# Altium PCB PCB.PcbDoc
Units mil, origin at the board's own origin, x right, y up, seen from the top; angles counter-clockwise.
Board outline 3975 x 2500 mil, 2 copper layers (Top Layer, Bottom Layer); 62 components, 49 nets, 234 pads, 54 vias.
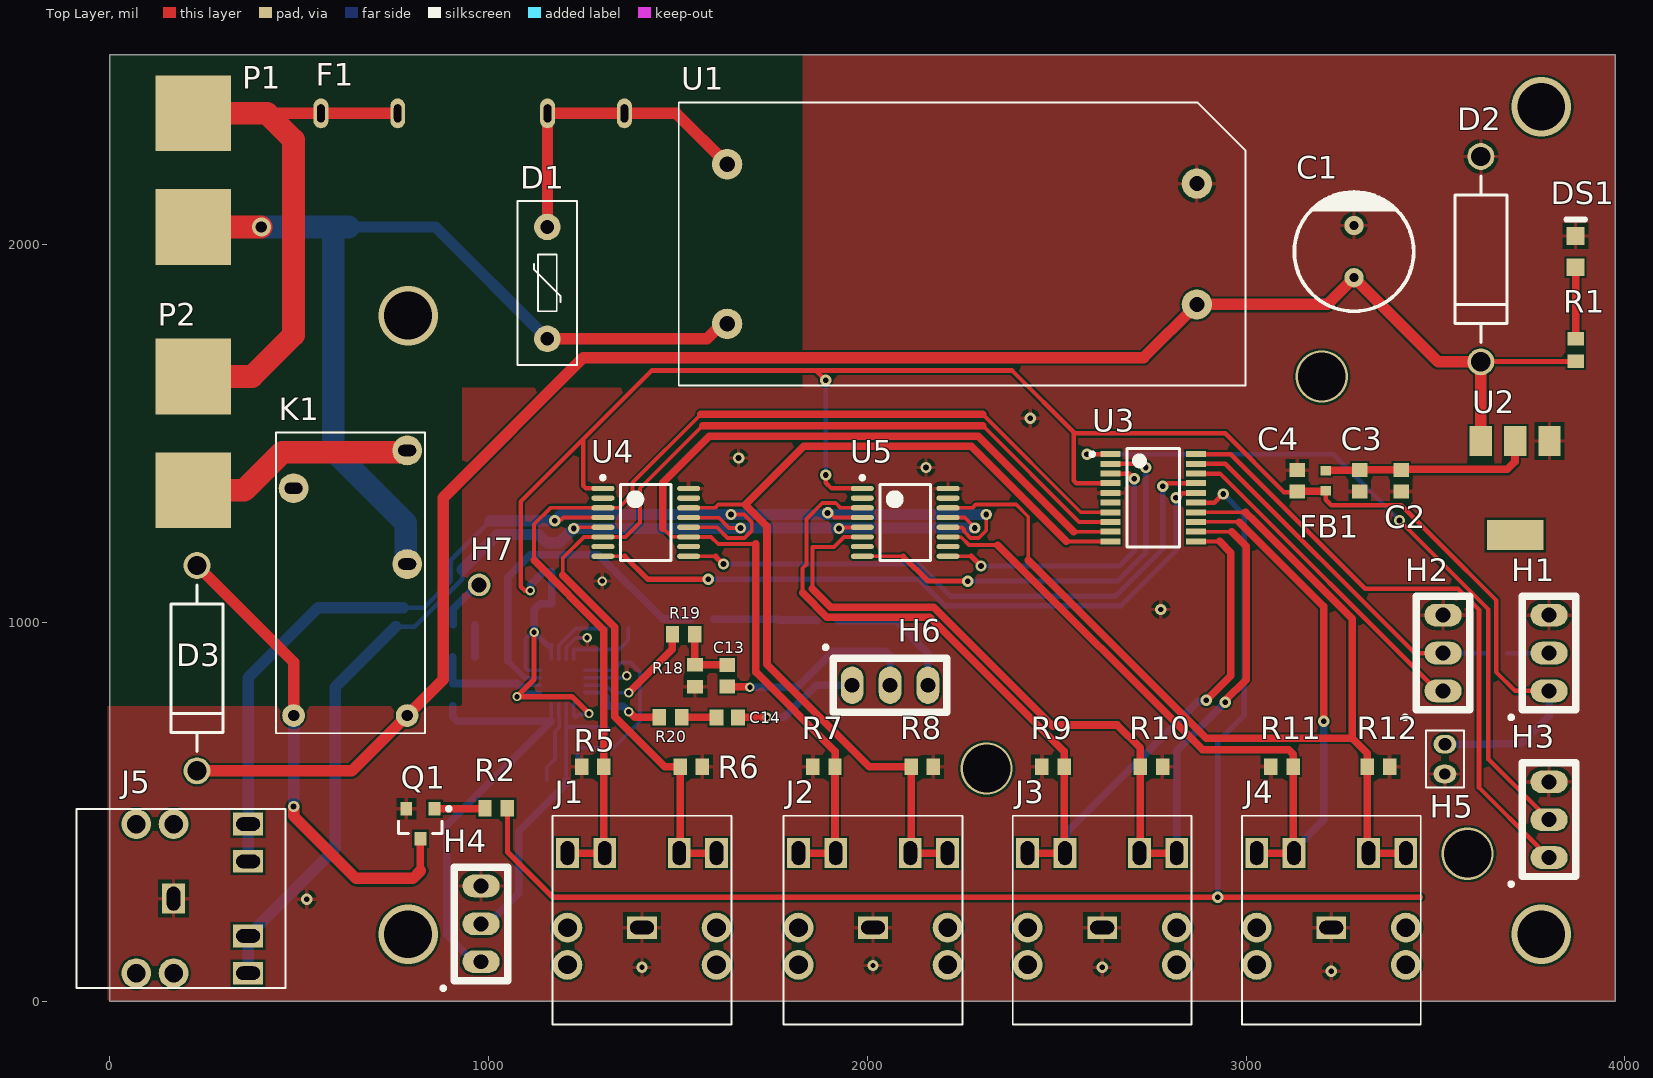
[diagram p0: Top Layer view]
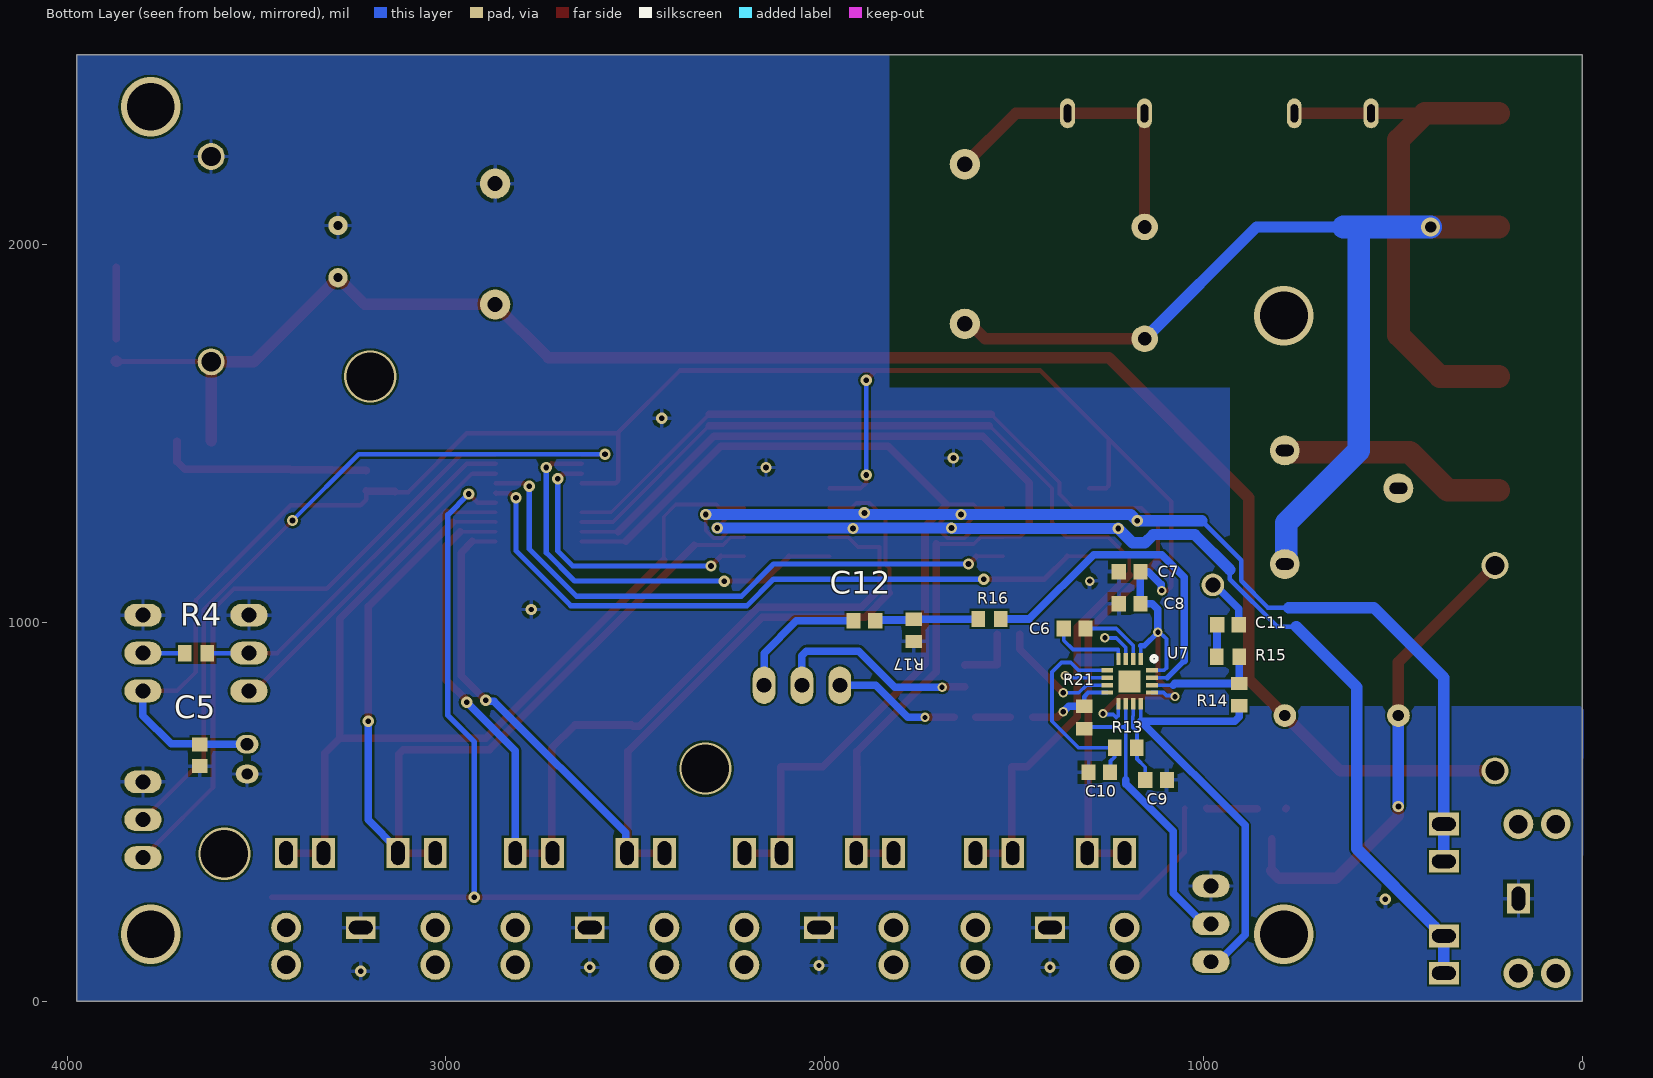
[diagram p1: Bottom Layer view, seen from below]

## Layer stack, top to bottom
Top Solder: solder mask 0.4, Solder Resist, Dk 3.5
Top Layer: signal copper 1.4
Dielectric 1: dielectric 12.6, FR-4, Dk 4.8
Bottom Layer: signal copper 1.4
Bottom Solder: solder mask 0.4, Solder Resist, Dk 3.5

## Board outline
0,0 3975,0 3975,2500 0,2500

## Design rules (kind name [scope] priority, off if disabled: settings)
Clearance [All] p1: gap=6 ignorepadtopadclearanceinfootprint=FALSE except(0: Arc-Hole Track-Hole SMDPad-Hole THPad-Hole Via-Hole Fill-Hole Poly-Hole Region-Hole Text-Hole)
PolygonConnect [All] p1: connectstyle=Relief reliefconductorwidth=10 reliefentries=4 polygonreliefangle="90 Angle" airgapwidth=10
RoutingVias [All] p1: holewidth=28 width=50 viastyle="Through Hole" minholewidth=10 minwidth=15 maxholewidth=196.85 maxwidth=196.85
SolderMaskExpansion [All] p1: expansion=4 istentingtop=FALSE
Width [All] p1: maxlimit=60 minlimit=10 preferedwidth=10 minimp=50.000000 maximp=50.000000 favimp=50.000000
30 further rules are at their usual default settings.

## Classes and differential pairs
component class ble: C5 C6 C7 C8 C9 C10 C11 C12 C13 C14 H4 H5 H6 H7 R13 R14 R15 R16 R17 R18 R19 R20 R21 U7
component class mcu: H1 H2 H3 J1 J2 J3 J4 J5 R4 R5 R6 R7 R8 R9 R10 R11 R12 U3 U4 U5
component class power: C1 C2 C3 C4 D1 D2 D3 DS1 F1 FB1 K1 P1 P2 Q1 R1 R2 U1 U2

## Components (designator, comment, footprint, x,y, rotation, side; value= is the part's Value field where it differs from the comment)
C1 "220uF/25V" "Capacitor 7*8" 3285,1980 r90 top
C2 "10uF" CAPC1608X90X35ML10T15 3410,1375 r90 top
C3 "100pF" CAPC1608X90X35ML10T15 3300,1375 r90 top
C4 "100pF" CAPC1608X90X35ML10T15 3135,1375 r270 top
C5 "10uF" CAPC1608X90X35ML10T15 3650,650 r90 bottom
C6 "1uF" CAPC1608X90X35ML10T15 1340,985 r180 bottom
C7 "1uF" CAPC1608X90X35ML10T15 1195,1135 r180 bottom
C8 "1uF" CAPC1608X90X35ML10T15 1195,1050 r180 bottom
C9 "1uF" CAPC1608X90X35ML10T15 1125,585 r0 bottom
C10 "1uF" CAPC1608X90X35ML10T15 1275,605 r180 bottom
C11 "0.47uF" CAPC1608X90X35ML10T15 935,995 r0 bottom
C12 "0.47uF" CAPC1608X90X35ML10T15 1895,1005 r180 bottom
C13 "0.47uF" CAPC1608X90X35ML10T15 1630,860 r90 top
C14 "0.47uF" CAPC1608X90X35ML10T15 1630,750 r180 top
D1 "TVR10391KS34Y" TVR10391KS34Y 1155,1897.36 r270 top
D2 "P6KE15A" ONSC-SURMETIC40-2-017AA-01 3620,1960 r90 top
D3 "P6KE15A" ONSC-SURMETIC40-2-017AA-01 230,880 r90 top
DS1 "HSMD-C170" AVAG-HSMX-C170_V 3870,1980 r90 top
F1 "Fuse 5*20" "Fuse 5*20" 957.83,2345 r0 top
FB1 "BLM18PG181SN1D" MURA-BLM18PG_KG-CHIP-2_V2 3210,1375 r270 top
H1 "DIP3 header" DIP3 3800,920 r90 top
H2 "DIP3 header" DIP3 3520,920 r90 top
H3 "DIP3 header" DIP3 3800,480 r90 top
H4 "DIP3 header" DIP3 980,205 r90 top
H5 "Pin Header P=2mm" "Pin Header P=2mm" 3525,640 r270 top
H6 "DIP3 header" DIP3 2060,835 r0 top
H7 "via" via 975,1100 r0 top
J1 "Jack 3,5 mm" "jack 3,5mm" 1405,195 r90 top
J2 "Jack 3,5 mm" "jack 3,5mm" 2015,195 r90 top
J3 "Jack 3,5 mm" "jack 3,5mm" 2620,195 r90 top
J4 "Jack 3,5 mm" "jack 3,5mm" 3225,195 r90 top
J5 "Jack 3,5 mm" "jack 3,5mm" 168.15,271.57 r0 top
K1 "G5Q-14-DC12" G5Q-14-DC12 785,1155 r90 top
P1 "220V pads" "220V pads" 220,2195 r90 top
P2 "220V pads" "220V pads" 220,1500 r90 top
Q1 "BCW32LT1G" ONSC-SOT-23-3-318-08_V 820,469.37 r270 top
R1 "1kOm" RESC1608X55X30ML20T10 3870,1720 r90 top
R2 "2.4kOm" RESC1608X55X30ML20T10 1020,510 r180 top
R4 "10kOm" RESC1608X55X30ML20T10 3660,920 r0 bottom
R5 "1MOm" RESC1608X55X30ML20T10 1275,620 r0 top
R6 "1MOm" RESC1608X55X30ML20T10 1535,620 r180 top
R7 "1MOm" RESC1608X55X30ML20T10 1885,620 r0 top
R8 "1MOm" RESC1608X55X30ML20T10 2145,620 r180 top
R9 "1MOm" RESC1608X55X30ML20T10 2490,620 r0 top
R10 "1MOm" RESC1608X55X30ML20T10 2750,620 r180 top
R11 "1MOm" RESC1608X55X30ML20T10 3095,620 r0 top
R12 "1MOm" RESC1608X55X30ML20T10 3350,620 r180 top
R13 "0Om" RESC1608X55X30ML20T10 1205,670 r180 bottom
R14 "10kOm" RESC1608X55X30ML20T10 905,810 r270 bottom
R15 "10kOm" RESC1608X55X30ML20T10 935,910 r180 bottom
R16 "10kOm" RESC1608X55X30ML20T10 1565,1010 r180 bottom
R17 "10kOm" RESC1608X55X30ML20T10 1765,980 r90 bottom
R18 "10kOm" RESC1608X55X30ML20T10 1545,860 r270 top
R19 "10kOm" RESC1608X55X30ML20T10 1515,970 r180 top
R20 "10kOm" RESC1608X55X30ML20T10 1480,750 r180 top
R21 "10kOm" RESC1608X55X30ML20T10 1315,750 r270 bottom
U1 "TAS5-12-WEDT" TAS5-12-WEDT 2250,2000 r0 top
U2 "AMS1117-3.3" AMS1117 3710.55,1480 r180 top
U3 "STM32G030F6P6" FP-TSSOP20-YA-MFG 2755,1330 r0 top
U4 "ADG888YRUZ-REEL7" ADI-RU-16_N 1415,1265 r0 top
U5 "ADG888YRUZ-REEL7" ADI-RU-16_N 2100,1265 r0 top
U7 "MAX97220A" MAX97220A 1195,845 r0 bottom

## Footprints (in the part's own frame and the unit in brackets; to place one, negate y for a bottom-side part, rotate by r counter-clockwise, add the part's x,y. Pads: shape width x height; smd on the part's side, far side on the other; paste and mask are expansions set on the pad)
"220V pads" [mil]
  rect 200x200 smd: 1(-150,0) 2(150,0)
ADI-RU-16_N [mm] "SOP, 16-Leads, Body 5x4.4mm, Pitch 0.65mm, IPC Medium Density"
  oval 1.55x0.35 smd: 1(-2.875,2.275) 2(-2.875,1.625) 3(-2.875,0.975) 4(-2.875,0.325) 5(-2.875,-0.325) 6(-2.875,-0.975) 7(-2.875,-1.625) 8(-2.875,-2.275) 9(2.875,-2.275) 10(2.875,-1.625) 11(2.875,-0.975) 12(2.875,-0.325) 13(2.875,0.325) 14(2.875,0.975) 15(2.875,1.625) 16(2.875,2.275)
  silkscreen extent -3,-2.55 1.7,3.12, body extent -2.25,-2.55 2.25,2.55, height 1.2
AMS1117 [mm]
  rect 1.5x2 smd: 1(-2.3,0) 2(0,0) 3(2.3,0)
  rect 3.8x2 smd: ""(0,6.3)
AVAG-HSMX-C170_V [mm] "SMD, 2-Leads, Body 2x1.25mm, Height 0.8mm"
  rect 1.2x1.2 smd: 1(-1.05,0) 2(1.05,0)
  silkscreen extent 2.15,-0.63 2.15,0.63, body extent -1,-0.63 1,0.63, height 0.8
"Capacitor 7*8" [mm]
  round 1.3 hole 0.6: 1(-1.75,0) 2(1.75,0)
  silkscreen extent -4,-4 4,4
CAPC1608X90X35ML10T15 [mm] "Chip Capacitor, 2-Leads, Body 1.60x0.80mm, IPC Low Density"
  rect 0.95x1.05 smd: 1(-0.725,0) 2(0.725,0)
  body extent -0.85,-0.45 0.85,0.45, height 0.9
DIP3 [mm]
  oval 1.524x2.5 hole 1: 1(-2.54,0) 2(0,0) 3(2.54,0)
  silkscreen extent -4.44,-1.8 3.81,2.67
FP-TSSOP20-YA-MFG [mm]
  rect 1.35x0.4 smd paste+0 mask+0: 1(-2.875,2.925) 2(-2.875,2.275) 3(-2.875,1.625) 4(-2.875,0.975) 5(-2.875,0.325) 6(-2.875,-0.325) 7(-2.875,-0.975) 8(-2.875,-1.625) 9(-2.875,-2.275) 10(-2.875,-2.925) 11(2.875,-2.925) 12(2.875,-2.275) 13(2.875,-1.625) 14(2.875,-0.975) 15(2.875,-0.325) 16(2.875,0.325) 17(2.875,0.975) 18(2.875,1.625) 19(2.875,2.275) 20(2.875,2.925)
  silkscreen extent -4.22,-3.3 1.75,3.3, body extent -3.65,-3.55 3.65,3.55, height 0.25
"Fuse 5*20" [mm]
  oval 1x2 hole 1.2 slot 0.5 at 0 deg: 1(-10.175,0) 1(-5.025,0) 2(5.025,0) 2(10.175,0)
G5Q-14-DC12 [mm]
  round 1.524 hole 0.762: 1(-10.16,0) 5(-10.16,7.62)
  round 2 hole 1.2 slot 0.75 at 0 deg: 2(0,0) 3(7.62,0) 4(5.08,7.62)
  silkscreen extent -11.35,-1.19 8.81,8.81
"jack 3,5mm" [mm]
  rect 1.524x2 hole 1.6 slot 0.9 at 0 deg: 1(0,0)
  rect 2x1.524 hole 0.9 slot 1.6 at 0 deg: 2(5,2.5) 2(5,5) 3(5,-5) 3(5,-2.5)
  round 2 hole 1.25: ""(-2.5,5) ""(-2.5,-5) ""(0,5) ""(0,-5)
  silkscreen extent -6.5,-6 7.5,6
MAX97220A [mil]
  rect 11x31 smd: 1(-29.53,-59.06) 2(-9.84,-59.06) 3(9.84,-59.06) 4(29.53,-59.06) 9(29.53,59.06) 10(9.84,59.06) 11(-9.84,59.06) 12(-29.53,59.06)
  rect 31x11 smd: 5(59.06,-29.53) 6(59.06,-9.84) 7(59.06,9.84) 8(59.06,29.53) 13(-59.06,29.53) 14(-59.06,9.84) 15(-59.06,-9.84) 16(-59.06,-29.53)
  rect 59x59 smd: 17(0,0)
  silkscreen extent -72,-67 -58,-53
MURA-BLM18PG_KG-CHIP-2_V2 [mm] "Chip Ferrite Bead, 2-Leads, Body 1.6x0.8mm, Height 0.95mm, Reflow, 0.5 to 1.5A Rated Current"
  rect 0.65x0.7 smd: 1(-0.675,0) 2(0.675,0)
  body extent -0.8,-0.4 0.8,0.4, height 0.95
ONSC-SOT-23-3-318-08_V [mm] "SOT23, 3-Leads, Body 2.92x1.3mm, Pitch 0.95mm"
  rect 0.9x0.8 smd: 1(-1,0.95) 2(-1,-0.95) 3(1,0)
  silkscreen extent -1.12,-1.46 0.65,2.03, body extent -0.65,-1.46 0.65,1.46, height 1.11
ONSC-SURMETIC40-2-017AA-01 [mm] "AXIAL, 2-Leads, Diameter 3.49mm"
  round 1.8 hole 1.3: 1(-6.887,0) 2(6.887,0)
  silkscreen extent -5.59,-1.75 5.59,1.75
"Pin Header P=2mm" [mm]
  oval 1.25x1.524 hole 0.85: 1(-1,0)
  oval 1.25x1.524 hole 0.762: 2(1,0)
  silkscreen extent -1.91,-1.27 1.91,1.27
RESC1608X55X30ML20T10 [mm] "Chip Resistor, 2-Leads, Body 1.60x0.80mm, IPC Low Density"
  rect 0.9x1.1 smd: 1(-0.75,0) 2(0.75,0)
  body extent -0.9,-0.5 0.9,0.5, height 0.55
TAS5-12-WEDT [mil]
  round 80 hole 40: 1(-620.08,-210.63) 2(-620.08,210.63) 3(620.08,159.45) 4(620.08,-159.45)
  silkscreen extent -748,-374 748,374
TVR10391KS34Y [mil]
  round 70 hole 36: 1(-147.64,0) 2(147.64,0)
  silkscreen extent -217,-79 217,79
via [mil]
  round 60 hole 39.37: 1(0,0)

## Part data
C1: library part "Capacitor 7*8"
C2 C3 C4 C5 C6 C7 C8 C9 C10 C11 C12 C13 C14: library part CMP-2006-02335-1, Manufacturer=Murata, Part Number=GCM1885C2A101JA16D
D2 D3: library part CMP-1061-00710-1, "600 W Peak Power Transient Voltage Suppressor, 2-Pin Surmetic(TM) 40, Pb-Free, Bulk Box", Manufacturer="On Semiconductor", PartNumber=P6KE15AG, ComponentLink1Description="Manufacturer URL", ComponentLink1URL=http://www.onsemi.com/, ComponentLink2Description=Datasheet, ComponentLink2URL=http://www.onsemi.com/pub_link/Collateral/P6KE6.8A-D.PDF, ComponentLink3Description="Package Specification", ComponentLink3URL=http://www.onsemi.cn/pub_link/Collateral/017AA.PDF, DatasheetVersion="Rev. 10", Direction=Unidirectional, IR Max (uA)=5, Mounting Technology="Through Hole", PackageDescription="2-Pin, Axial Lead, Diameter 3.49 mm", PackageReference=SURMETIC40-2-017AA-01, PackageVersion="Rev. O, 09/2005", Packing="Bulk Box", PPK Max (W)=600, RoHS=Pb-Free, V(BR) Typ (V)=15.05
DS1: library part CMP-2000-06421-1, "LED Uni-Color Orange, 52 mW, 20 mA, -40 to 85 degC, 2-Pin SMD, RoHS, Tape and Reel", Forward Current If=20mA, Forward Voltage=2.2V, LED Colour=Orange, Manufacturer=Avago, Operating Temperature Max=85°C, Operating Temperature Min=-30°C, Operating Temperature Range=-30°Cto+85°C, Opto Case Style=SMD, Package Description="2-Pin Surface Mount Device, Body 2 x 1.25 mm, Height 0.8 mm", Package Reference=HSMX-C170, Power Dissipation Pd=52mW, Storage Temperature Min=-40°C, Bulb Size=1.25mmx1.4mm, Datasheet URL=http://docs.avagotech.com/docs/AV02-0551EN, Datasheet Version=03/2012, Dominant Wavelength=604nm, External Depth=0.8mm, External Length / Height=2mm, External Width=1.25mm, Forward Current If Max=20mA, Forward Voltage VF Max=2.2V, LED Mounting=SMD, LED Type=Standard, Lens Shape=Rectangular, Light Area Height=1.25mm, Luminous Intensity=8mcd, Luminous Intensity Typ=8mcd, Manufacturer URL=http://www.avagotech.com/, Mounting Technology=SurfaceMount, Mounting Type=SMD, MSL=MSL2A-4weeks, No. of Pins=2, Opto Mounting Orientation=Top, Package / Case=SMD, Peak Forward Current=20mA, Peak Wavelength=605nm, PIV Max=5V, Storage Temperature Max=85°C, SVHC=NoSVHC(19-Dec-2012), Viewing Angle=170°, Voltage Vf Typ=2.2V, Wavelength Typ=605nm
FB1: library part CMP-0686-00566-2, "Chip Ferrite Bead for Power Lines, 180 Ohm, 1500 mA, -55 to 125 degC, 1.6 x 0.8 x 0.95 mm SMD, Tape and Reel", DC Resistance="0.09 Ohm Max.", Manufacturer=Murata, Operating Temperature Range="-55 to 125 degC", Rated Current="1500 mA", ComponentLink1Description="Manufacturer URL", ComponentLink1URL=http://www.murata.com/, ComponentLink2Description=Datasheet, ComponentLink2URL=http://www.murata.com/products/catalog/pdf/c31e.pdf, ComponentLink3Description="Package Specification", ComponentLink3URL=http://www.murata.com/products/catalog/pdf/c31e.pdf, DatasheetVersion=08/2013, Impedance (at 100 MHz)="180 Ohm +/- 25%", Mounting Technology="Surface Mount", PackageDescription="2-Pin Chip, Body 1.6 x 0.8 mm", PackageReference=BLM18_H950-2, Packing="Tape and Reel", PartNumber=BLM18PG181SN1D
Q1: library part CMP-1048-00823-1, "General Purpose Transistor, NPN Silicon, 3-Pin SOT-23, Pb-Free, Tape and Reel", Manufacturer="On Semiconductor", ComponentLink1Description="Manufacturer URL", ComponentLink1URL=http://www.onsemi.com/, ComponentLink2Description=Datasheet, ComponentLink2URL=http://www.onsemi.com/pub_link/Collateral/BCW32LT1-D.PDF, ComponentLink3Description="Package Specification", ComponentLink3URL=http://www.onsemi.cn/pub_link/Collateral/318-08.PDF, DatasheetVersion="Rev. 2", IC Continuous (A)=0.1, Mounting Technology="Surface Mount", PackageDescription="3-Pin Small Outline Transistor, Body 2.92 x 1.3 mm, Pitch 0.95 mm", PackageReference=SOT-23-3-318-08, PackageVersion="Rev. AP, 11/2009", Packing="Tape and Reel", PartNumber=BCW32LT1G, Polarity=NPN, RoHS=TRUE
R1 R2 R4 R5 R6 R7 R8 R9 R10 R11 R12 R13 R14 R15 R16 R17 R18 R19 R20 R21: library part CMP-2000-01555-1, Manufacturer="KOA Speer", Part Number=RK73H1JTTD5101F
U3: library part CMP-12105-000034-1, "ARM MICROCONTROLLERS - MCU", Ambient Temperature Range High=+85°C, Ambient Temperature Range Low=-40°C, Frequency=64MHz, Manufacturer=STMicroelectronics, Max Junction Temp=+105°C, Max Supply Voltage=3.6V, Min Supply Voltage=2V, Package=TSSOP20-YA, Temperature="-40°C to +85°C", Automotive=No, Category=IC, ComponentLink2Description=Datasheet, ComponentLink2URL=https://www.st.com/resource/en/datasheet/stm32g030f6.pdf, Core Architecture="ARM Cortex-M0+", Data Bus Width=32bits, Device Class L1="Integrated Circuits (ICs)", Device Class L2="Embedded Processors and Controllers", Device Class L3=Microcontrollers, Digikey Description="ARM MICROCONTROLLERS - MCU", Height=1.2mm, Interface=I2C,SPI,USART,LIN,IrDA,I2S,SMBus, Lead Free=Yes, Manufacturer Part Number=STM32G030F6P6, Memory Size=32KBytes, Memory Type=FLASH, Number Of A/D Converters=1, Number Of Adc Channels=16, Number Of Cores=1, Number Of I2C Channels=2, Number Of I/Os=17, Number Of Pwm Channels=11, Number Of Spi Channels=3, Number Of Timers/Counters=6, Number Of Uart Channels=2, Octopart=https://octopart.com/stm32g030f6p6-stmicroelectronics-103773023, Ram Size=8KBytes, RoHS=TRUE, Standoff Height=0.05mm, Temperature Range High=+85°C, Temperature Range Low=-40°C
U4 U5: library part CMP-0790-00216-1, "0.4 Ohm CMOS, Dual DPDT Switches, -40 to 125 degC, 16-pin SOP (RU-16), Reel", Manufacturer="Analog Devices", Power Dissipation=20uW, # Sw Functions=2, Code_JEDEC=MO-153AB, ComponentLink1Description="Manufacturer URL", ComponentLink1URL=http://www.analog.com/en/index.html, ComponentLink2Description=Datasheet, ComponentLink2URL=http://www.analog.com/static/imported-files/data_sheets/ADG888.pdf, ComponentLink3Description="Package Specification", ComponentLink3URL=http:/www.analog.com/static/imported-files/packages/36244347913743854010197452789RU16.pdf, Configuration=SPDT, DatasheetVersion="Rev. A", Id, Is (ON)="200pA, 200pA, 200pA", Is OFF="200pA, 200pA, 200pA", Max Pos Supply=5.5V, Min Pos Supply=1.8V, Mounting Technology="Surface Mount", PackageDescription="16-Pin Thin Shrink Small Outline Package, Body 5 x 4.4 mm, Pitch 0.65 mm", PackageReference=RU-16, PackageVersion=Nov-02, Packing=Reel, PartNumber=ADG888YRUZ-REEL7, Ron (ohms)=0.4
D1: ComponentLink1Description=https://lcsc.com/product-detail/Varistors_TKS-TVR10391KS34Y_C2760960.html
F1: ComponentLink1Description=https://lcsc.com/product-detail/span-style-background-color-ff0-Fuse-span-Holders_Xucheng-Elec-C3130_C3130.html
J1 J2 J3 J4 J5: ComponentLink1Description=https://lcsc.com/product-detail/Audio-Video-Connectors_BOOMELE-Boom-Precision-Elec-PJ-307C_C16684.html
K1: ComponentLink1Description=https://lcsc.com/product-detail/Relays_Omron-Electronics-G5Q-14-DC12_C225715.html
U1: ComponentLink1Description=https://lcsc.com/product-detail/Power-Modules_TDPOWER-TAS5-12-WEDT_C2687652.html
U2: ComponentLink1Description="New link", ComponentLink1URL=https://lcsc.com/product-detail/Low-Dropout-Regulators-LDO_Slkor-SLKORMICRO-Elec-AMS1117-3-3_C426566.html, ComponentLink2Description="New link", ComponentLink2URL=https://lcsc.com/product-detail/Low-Dropout-Regulators-LDO_PUOLOP-AMS1117-3-3_C351784.html

## Via types
v1: diameter 30, hole 15, Top Layer to Bottom Layer, 27 vias
v2: diameter 25, hole 14, Top Layer to Bottom Layer, 8 vias
v3: diameter 30, hole 14, Top Layer to Bottom Layer, 8 vias
v4: diameter 157.48, hole 125.98, Top Layer to Bottom Layer, 4 vias
v5: diameter 137.8, hole 125.98, Top Layer to Bottom Layer, 3 vias
v6: diameter 24, hole 14, Top Layer to Bottom Layer, 3 vias
v7: diameter 50, hole 30, Top Layer to Bottom Layer, 1 vias

## Nets (pads, with @x,y where several pads share a name; then routed paths per layer and width w, separated by ;. In a path a pad name is that pad's centre, name@x,y a point inside that pad or via, vN(x,y) a via of type N, cw(c..) or ccw(c..) an arc to the next point about the centre after c; other vN are vias at no path point)
GND: C1.2 C2.1 C3.1 C4.1 C5.1 C7.1 C8.1 C9.1 C10.1 D2.2 DS1.2 H1.3 H2.3 H3.3 H4.3 H5.2 J1.1 J2.1 J3.1 J4.1 J5.1 Q1.2 R5.1 R6.1 R7.1 R8.1 R9.1 R10.1 R11.1 R12.1 R17.1 R18.2 U1.3 U2.1 U3.5 U4.16 U5.16 U7.3 U7.6 | length 211.3
  Top Layer w20: Q1.2@781.3,510.04 Q1.2
  Bottom Layer w10: U7.3 1204.84,934.84 1230,960 v2(1260,960) ; U7.6 1355.78,854.84 1360.94,860 v2(1365,860)
  other v1: 2155,1410 1660,1435
  other v2: 1300,1110
  other v3: 3225,80 1405,90 2620,90 2015,95 520,270 2775,1035 2430,1540
NetC1_1: C1.1 D2.1 D3.1 K1.1 R1.1 U1.4 U2.3 | length 4762.2
  Top Layer w14: D2.1@3620.82,1689.66 R1.1@3869.18,1689.66
  Top Layer w30: D3.1 638.84,608.84 K1.1 880,850 880,1330 1250,1700 2729.53,1700 U1.4 3214.45,1840.55 C1.1 3507.26,1688.84 D2.1 ; U2.3 D2.1 ; D2.1@3620.82,1689.66 D2.1 ; R1.1@3869.18,1689.66 R1.1
NetC2_2: C2.2 C3.2 FB1.1 U2.2 | length 564.9
  Top Layer w14: U2.2@3710,1479.45 U2.2
  Top Layer w20: FB1.1 3210.98,1402.56 3299.02,1402.56 C3.2 C2.2 3411.46,1405 3690,1405 3710,1425 U2.2@3710,1479.45
NetC4_2: C4.2 C5.2 C7.2 C8.2 FB1.2 H1.1 H5.1 U3.4 U4.1 U5.1 U7.1 U7.9 U7.13 U7.16 | length 5844.7
  Top Layer w12: v2(1110,1085) 1095,1085 1085,1095 1085,1320 1250,1485 ; U4.1 1257.03,1354.57 1250,1361.6 1250,1485 ; v1(1890,1390) 1890,1370 1905.43,1354.57 U5.1 ; v1(1890,1640) 1864,1666 ; U3.4 2552.03,1368.39 2545,1375.42 2545,1502.97 ; C4.2 3133.54,1345 3100,1345 2945,1500 2547.97,1500 2545,1502.97 ; FB1.2 3210,1325 3225,1310 3410,1310 3507.61,1212.39 3660,1060 3660,870 3710,820 H1.1 ; 1250,1485 1431,1666 1864,1666 ; 1864,1666 2381.97,1666 2545,1502.97
  Top Layer w14: v2(1120,975) 1120,850 v6(1075,805) 1220,805 v6(1265,760)
  Top Layer w20: C4.2 3135.98,1347.44 3209.02,1347.44 FB1.2
  Bottom Layer w10: v6(1075,805) 1077.68,807.68 1097.68,807.68 1105.47,815.47 U7.13 ; v2(1120,975) 1115.94,975 1105.94,965 1105,965 1097.73,957.73 1097.73,880.39 1103.59,874.53 U7.16 ; U7.1 1165.47,939.53 ; U7.9 1224.53,755.47 1230,750 1238,758 1263,758 v6(1265,760)
  Bottom Layer w12: v1(1890,1390) v1(1890,1640)
  Bottom Layer w14: v2(1120,975) 1155.47,939.53 1165.47,939.53
  Bottom Layer w20: v2(1110,1085) 1110.96,1085.96 1110.96,1100.96 1145,1135 C7.2 C8.2 1135,1050 1120,1035 v2(1120,975) ; H5.1 3525.41,678.96 3649.59,678.96 C5.2 3651.46,680 3725,680 3800,755 H1.1
NetC6_1: C6.1 U7.4 | length 210.9
  Bottom Layer w10: U7.4 1224.53,929.53 1344.53,929.53 1368.54,953.54 C6.1
NetC6_2: C6.2 U7.2 | length 181
  Bottom Layer w10: U7.2 1185.16,940.16 1230,985 C6.2
NetC9_2: C9.2 R13.2 U7.11 | length 215.1
  Bottom Layer w10: C9.2 1153.54,618.54 1175,640 1175,669.53 R13.2 1175.47,712.41 1186.47,723.41 1186.47,752.95 1185.16,754.27 U7.11
NetC10_2: C10.2 R13.1 U7.5 | length 559.2
  Bottom Layer w10: C10.2 1245,606.46 1245,635 1235,645 1235,669.53 R13.1 1330,670 1400,740 1400,870 1375,895 1350,895 1329.53,874.53 U7.5
NetC11_1: C11.1 H7.1 | length 139.2
  Bottom Layer w20: C11.1 906.46,1036.46 965,1095 H7.1@980,1095
NetC11_2: C11.2 R15.1 | length 85.4
  Bottom Layer w20: C11.2 964.04,994.51 964.04,910.49 R15.1
NetC12_1: C12.1 H6.3 | length 356.7
  Bottom Layer w20: C12.1 2075,1005 2160,920 H6.3
NetC12_2: C12.2 R16.1 R17.2 | length 274
  Bottom Layer w20: R16.1 1594.76,1009.76 1764.76,1009.76 R17.2 1767.26,1007.26 1864.19,1007.26 C12.2
NetC13_1: C13.1 H6.2 | length 553.1
  Top Layer w20: C13.1 1630.73,830.73 1689.27,830.73 v2(1690,830)
  Bottom Layer w20: v2(1690,830) 1815,830 1910,925 2048.28,925 2060,913.28 H6.2
NetC13_2: C13.2 R18.1 R19.1 | length 166.1
  Top Layer w10: R18.1@1544.53,890 R18.1
  Top Layer w20: R18.1@1544.53,890 R19.1 ; R18.1 1545.49,889.04 1629.51,889.04 C13.2
NetC14_1: C14.1 H6.1 | length 336.7
  Top Layer w20: C14.1 v2(1735,750)
  Bottom Layer w20: v2(1735,750) 1780,750 1865,835 H6.1
NetC14_2: C14.2 R20.1 | length 91.9
  Top Layer w20: R20.1 C14.2
NetD1_1: D1.1 F1.2 U1.2 | length 830.2
  Top Layer w30: D1.1 1155.33,2045.33 1155.33,2344.67 1155.67,2345 1358.43,2345 1495.55,2345 U1.2
NetD1_2: D1.2 K1.2 P1.1 U1.1 | length 2523.6
  Top Layer w30: D1.2 1576.75,1749.72 1616.39,1789.37 U1.1
  Top Layer w60: P1.1 v7(400,2045)
  Bottom Layer w30: 629.86,2045 859.72,2045 D1.2
  Bottom Layer w60: v7(400,2045) 580,2045 ; 629.86,2045 580,2045 ; K1.2 781.41,1158.59 781.41,1263.59 590,1455 590,2035 580,2045
NetD3_2: D3.2 K1.5 Q1.3 | length 1263.4
  Top Layer w20: 820,345 Q1.3
  Top Layer w30: D3.2 485,896.16 K1.5 ; v1(485,515) 485,490 650,325 800,325 820,345
  Bottom Layer w30: v1(485,515) K1.5
NetDS1_1: DS1.1 R1.2 | length 189.1
  Top Layer w20: R1.2 DS1.1
NetF1_1: F1.1 P1.2 P2.2 | length 1464.6
  Top Layer w30: 415,2345 557.24,2345 F1.1@760,2345
  Top Layer w60: P2.2 375,1650 485,1760 485,2275 415,2345 P1.2
NetH1_2: H1.2 R4.2 | length 110.5
  Bottom Layer w12: R4.2 H1.2
NetH2_1: H2.1 U3.18 | length 889.6
  Top Layer w12: U3.18 2931.02,1393.98 3505,820 H2.1
NetH2_2: H2.2 R4.1 U3.19 | length 969.2
  Top Layer w12: U3.19 2945.43,1419.57 3445,920 H2.2
  Bottom Layer w12: H2.2 R4.1
NetH3_1: H3.1 U3.20 | length 1651.7
  Top Layer w12: U3.20 2959.84,1445.16 3315,1090 3559.54,1090 3615,1034.54 3615,565 3771.6,408.4 3771.6,402.17 3793.78,380 H3.1
NetH3_2: H3.2 U3.1 | length 1916.6
  Top Layer w12: v1(2580,1445) 2580.08,1445.08 2641.73,1445.08 U3.1 ; v1(3405,1270) 3640,1035 3640,640 3771.6,508.4 3771.6,502.17 3793.78,480 H3.2
  Bottom Layer w12: v1(2580,1445) 3230,1445 v1(3405,1270)
NetH4_1: H4.1 R14.2 U7.12 | length 1137.2
  Bottom Layer w10: 1165.47,740.47 U7.12
  Bottom Layer w20: R14.2 905,752.19 916.72,740.47 1165.47,740.47 890,465 890,175.79 960.79,105 H4.1
NetH4_2: H4.2 R21.2 U7.10 | length 797.4
  Bottom Layer w10: 1204.84,585 1204.84,725 ; U7.10 1204.84,725 ; R21.2 1310.47,725 1204.84,725
  Bottom Layer w20: H4.2 999.21,205 1080,285.79 1080,449.46 1204.84,574.3 1204.84,585
NetJ1_2: J1.2 R5.2 U3.7 U4.3 | length 2810.4
  Top Layer w10: 1120,1165 1120,1260 1163.39,1303.39 U4.3 1343.39,1303.39 1380,1340 1380,1370 1560,1550 ; 2305,1550 2563.39,1291.61 U3.7
  Top Layer w20: 1120,1165 1304.53,980.47 R5.2 1304.53,393.9 1306.57,391.85 J1.2@1208.15,391.85 ; 1560,1550 2305,1550
NetJ1_3: J1.3 R6.2 U3.8 U4.6 | length 2778.7
  Top Layer w10: 1195.88,1125.88 1195.88,1170.88 1251.61,1226.61 U4.6 1361.61,1226.61 1400,1265 1400,1355 1565,1520 ; 2305,1520 2558.98,1266.02 U3.8
  Top Layer w20: 1195.88,1125.88 1333.38,988.38 1333.38,751.62 1465,620 R6.2 1505.47,393.9 1503.43,391.85 J1.3@1601.85,391.85 ; 1565,1520 2305,1520
NetJ2_2: J2.2 R7.2 U3.9 U4.11 | length 2721.7
  Top Layer w10: 1460,1250 1482.68,1227.32 1527.48,1227.32 U4.11 1587.47,1226.61 1606.09,1208 1705,1208 ; 2544.57,1240.43 U3.9
  Top Layer w20: 1460,1250 1460,1370 1582.23,1492.23 2292.77,1492.23 2544.57,1240.43 ; 1705,1208 1705,870 1915,660 1915,620.47 R7.2 1914.53,393.9 1916.57,391.85 J2.2@1818.15,391.85
NetJ2_3: J2.3 R8.2 U3.10 U4.14 | length 2550.5
  Top Layer w10: U4.14 1597.49,1303.39 1606.11,1312 1678,1312 ; 2525.16,1214.84 U3.10
  Top Layer w20: J2.3@2211.85,391.85 2113.43,391.85 2115.47,393.9 R8.2 2005,620 1735,890 1735,1255 1678,1312 1832.23,1466.23 2273.77,1466.23 2525.16,1214.84
NetJ3_2: J3.2 R9.2 U3.11 U5.3 | length 2701.6
  Top Layer w10: 1829,1079.23 1829,1144 1839,1154 1839,1274 1881,1316 1916.53,1316 1929.14,1303.39 U5.3 ; U3.11 2930.16,1214.84
  Top Layer w20: 1829,1079.23 1893.23,1015 2165,1015 2520,660 2520,620.47 R9.2 2519.53,393.9 2521.57,391.85 J3.2@2423.15,391.85 ; v1(2895,795) 2960,860 2960,1185 2930.16,1214.84
  Bottom Layer w20: J3.2@2521.57,401.22 2521.57,391.85 2525,395.28 2525,445 2873.09,793.09 2893.09,793.09 v1(2895,795)
NetJ3_3: J3.3 R10.2 U3.12 U5.6 | length 2706.2
  Top Layer w10: 1855,1090 1855,1200 1911.77,1200 1938.38,1226.61 U5.6 ; U3.12 2962.07,1240.43
  Top Layer w20: 1855,1090 1904,1041 2175.77,1041 2490.1,726.67 2506.67,726.67 2510,730 2660,730 2720.47,669.53 R10.2 2720.47,393.9 2718.43,391.85 J3.3@2816.85,391.85 ; v1(2945,790) 2945,795 3000,850 3000,1202.5 2962.07,1240.43
  Bottom Layer w20: J3.3@2816.85,391.85 2816.85,661.85 v1(2945,790)
NetJ4_2: J4.2 R11.2 U3.13 U5.11 | length 2622.6
  Top Layer w10: U5.11 2213.91,1225.89 2247.94,1225.89 2268.68,1205.15 2344.85,1205.15 ; U3.13 2868.58,1266.42 2981.42,1266.42 2982.44,1265.39
  Top Layer w20: 2344.85,1205.15 2885,665 3112.81,665 3124.53,653.28 R11.2 3124.53,393.9 3126.57,391.85 J4.2@3028.15,391.85 ; 2982.44,1265.39 3205,1042.83 v1(3205,740)
  Bottom Layer w20: J4.2@3126.57,391.85 3126.57,401.22 3205,479.65 v1(3205,740)
NetJ4_3: J4.3 R12.2 U3.14 U5.14 | length 2656.3
  Top Layer w10: U5.14 2277.36,1303.39 2285.97,1312 2393,1312 2425,1280 2425,1165 ; U3.14 2998.39,1291.61
  Top Layer w20: 2425,1165 2895,695 3280,695 ; 2998.39,1291.61 3025,1265 3280,1010 3280,695 ; J4.3@3421.85,391.85 3323.43,391.85 3320.47,394.8 R12.2 3320,620.47 3320,655 3280,695
NetJ5_2: J5.2 U4.4 U4.12 U5.4 U5.12 | length 3313.6
  Top Layer w10: v1@1175,1270 v1(1175,1269.06) 1178.83,1272.88 1192.29,1272.88 1197.2,1277.8 U4.4 ; U4.12 1602.8,1252.2 1631,1224 1675.77,1224 1695,1243.23 1695,1265 1674,1286 v1(1640,1286) ; v1(1895,1290) 1900.41,1290 1912.62,1277.8 U5.4 ; U5.12 2213.91,1251.48 2249.87,1251.48 2255,1246.35 2255,1241.46 2272.46,1224 2294,1224 2314,1244 v1(2314,1286)
  Bottom Layer w12: 775,1040 829.54,1040 900,1110.46 900,1165 1004.06,1269.06
  Bottom Layer w30: J5.2@365,370 365,468.43 365,855 550,1040 775,1040 ; 1004.06,1269.06 v1(1175,1269.06) 1191.94,1286 v1(1640,1286) 1891,1286 v1(1895,1290) 1899,1286 v1(2314,1286)
NetJ5_3: J5.3 U4.5 U4.13 U5.5 U5.13 | length 3123.5
  Top Layer w10: v1(1225,1249) 1228.2,1252.2 U4.5 ; U4.13 1528.91,1277.07 1607.93,1277.07 1635,1250 v1(1665,1250) ; v1(1925,1249) 1927.48,1251.48 1986.09,1251.48 U5.5 ; U5.13 2257.2,1277.8 2279.97,1255.03 2279.97,1253.26 v1(2283.23,1250)
  Bottom Layer w12: 755,990 805,990 930,1115 930,1140
  Bottom Layer w30: J5.3@365,74.72 365,173.15 374.37,173.15 389.37,188.15 389.37,197.52 595,403.15 595,830 755,990 ; 930,1140 1023.06,1233.06 1131.94,1233.06 1154,1211 1187,1211 v1(1225,1249) ; v1@1225.5,1249.5 1226,1249 1664,1249 v1(1665,1250) 1924,1250 v1(1925,1249) ; v1@1925,1250 v1(2283.23,1250)
NetK1_3: K1.3 P2.1 | length 608.5
  Top Layer w14: K1.3@780,1450 K1.3
  Top Layer w60: P2.1 355,1350 455,1450 K1.3@780,1450
NetQ1_1: Q1.1 R2.2 | length 133.6
  Top Layer w20: Q1.1 858.03,509.37 989.84,509.37 R2.2
NetR2_1: R2.1 U3.15 | length 3772.9
  Top Layer w12: U3.15 2915.76,1317.2 v1@2938.56,1340
  Top Layer w14: R2.1 1050,509.53 1050,395 1170,275 v1(2925,275) 3460,275 ; v1@2938.56,1340 v1(2940,1340)
  Bottom Layer w14: v1(2925,275) 2925,685 2995,755 2995,1285 v1(2940,1340)
NetR14_1: R14.1 R15.2 U7.14 | length 303.4
  Bottom Layer w10: 1080,835.16 U7.14
  Bottom Layer w20: R15.2 905.24,909.76 905.24,839.76 R14.1 1075.63,839.53 1080,835.16
NetR16_2: R16.2 U7.15 | length 905.4
  Bottom Layer w10: 1095,855 1135.79,855 U7.15
  Bottom Layer w14: 1050,900 1095,855
  Bottom Layer w20: 1050,900 1050,1120 1110,1180 1290,1180 1460,1010 R16.2
NetR19_2: R19.2 U7.7 | length 327.1
  Top Layer w10: R19.2@1485,969.53 R19.2
  Top Layer w20: v2(1370,815) 1485,930 R19.2@1485,969.53
  Bottom Layer w10: U7.7 1308.88,835.16 1329.04,815 v2(1370,815)
NetR20_2: R20.2 R21.1 U7.8 | length 238.5
  Top Layer w20: v6(1370,765) 1371.08,765 1386.08,750 R20.2
  Bottom Layer w10: U7.8 1304.53,815.47
  Bottom Layer w12: 1304.53,815.47 1315,805 R21.1
  Bottom Layer w20: R21.1 1355.47,779.53 v6(1370,765)
NetU3_2: U3.2 U5.8 | length 1128.5
  Top Layer w10: U5.8 2094.57,1175.43
  Top Layer w12: U3.2 2721.1,1419.57
  Top Layer w14: 2094.57,1175.43 2160,1110 v1(2265,1110) ; 2721.1,1419.57 2730.67,1410 v1(2735,1410)
  Bottom Layer w14: v1(2265,1110) 2660,1110 2735,1185 v1(2735,1410)
NetU3_3: U3.3 U5.9 | length 777.9
  Top Layer w10: U5.9 2274.57,1175.43
  Top Layer w12: U3.3 2689.39,1393.98
  Top Layer w14: 2274.57,1175.43 v1(2300,1150) ; 2689.39,1393.98 2703.36,1380 v1(2705,1380)
  Bottom Layer w14: v1(2300,1150) 2665,1150 2705,1190 v1(2705,1380)
NetU3_16: U3.16 U4.8 | length 1827
  Top Layer w10: U4.8 1359.57,1175.43
  Top Layer w12: v1@2819.33,1330 2831.25,1341.92 2867.32,1341.92 U3.16
  Top Layer w14: 1359.57,1175.43 1420,1115 v3(1580,1115) ; v1(2815,1330) v1@2819.33,1330 ; U3.16@2867.32,1341.92 U3.16
  Bottom Layer w14: v3(1580,1115) 2135,1115 2205,1045 2670,1045 2815,1190 v1(2815,1330)
NetU3_17: U3.17 U4.9 | length 1603.9
  Top Layer w10: U4.9 1599.57,1175.43
  Top Layer w12: v1@2784.33,1360 2792.72,1368.39 U3.17
  Top Layer w14: 1599.57,1175.43 v1(1620,1155) ; v1(2780,1360) v1@2784.33,1360
  Bottom Layer w14: v1(1620,1155) 2135,1155 2220,1070 2655,1070 2780,1195 v1(2780,1360)
pads on no net: J1. J2. J3. J4. J5. K1.4 U2. U3.6 U4.2 U4.7 U4.10 U4.15 U5.2 U5.7 U5.10 U5.15 U7.17
copper on no net:
  other v4: 787.4,177.17 3779.53,177.17 787.4,1811.02 3779.53,2362.2
  other v5: 3585,390 2315,615 3200,1650

## Polygon pours and split planes (outlines as drawn)
GND on Top Layer "NONET_L-01_P-001" (solid, pour order 0): 3975,2500 3975,0 0,0 -5,5 -5,780 925,780 930,785 930,1620 1830,1620 1830,2500
GND on Bottom Layer "NONET_L-01_P-001" (solid, pour order 1): 0,0 3975,0 3975,2500 1830,2500 1830,1620 930,1620 930,785 925,780 -5,780

## Silkscreen, mask and mechanical layers (free items; w line width, h text height)
Mechanical 1:
  lines w5: 0,0 1800,0 3275,0 3975,0 3975,2500 0,2500 0,0

## Text inside footprints (layer, text, board x,y; h text height)
FB1: Mechanical 6 "Land Pattern Adapted for Reflow Soldering" at 3233.62,1414.37 h1.97 r270